# Altium PCB MAX30102_Adapter_PCB.PcbDoc
Units mm, origin at the board's own origin, x right, y up, seen from the top; angles counter-clockwise.
Board outline 7.87 x 10.29 mm, 2 copper layers (Top Layer, Bottom Layer); 6 components, 7 nets, 24 pads, 7 vias.
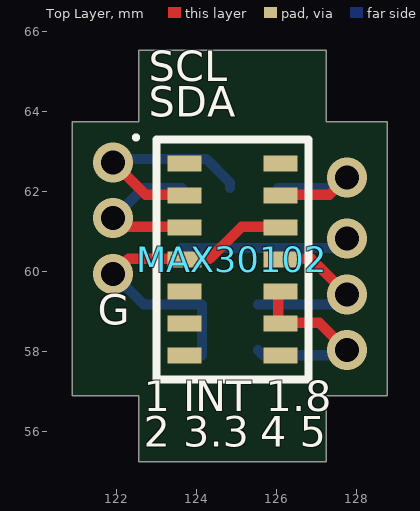
[diagram p0: Top Layer view]
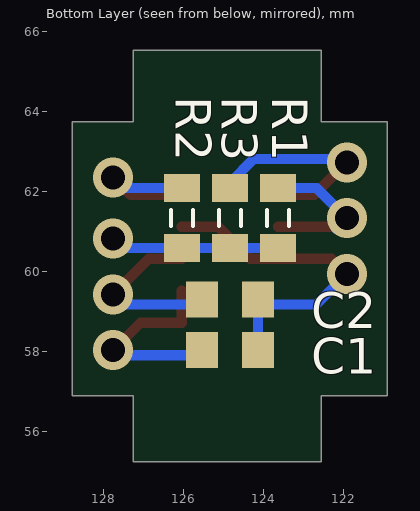
[diagram p1: Bottom Layer view, seen from below]
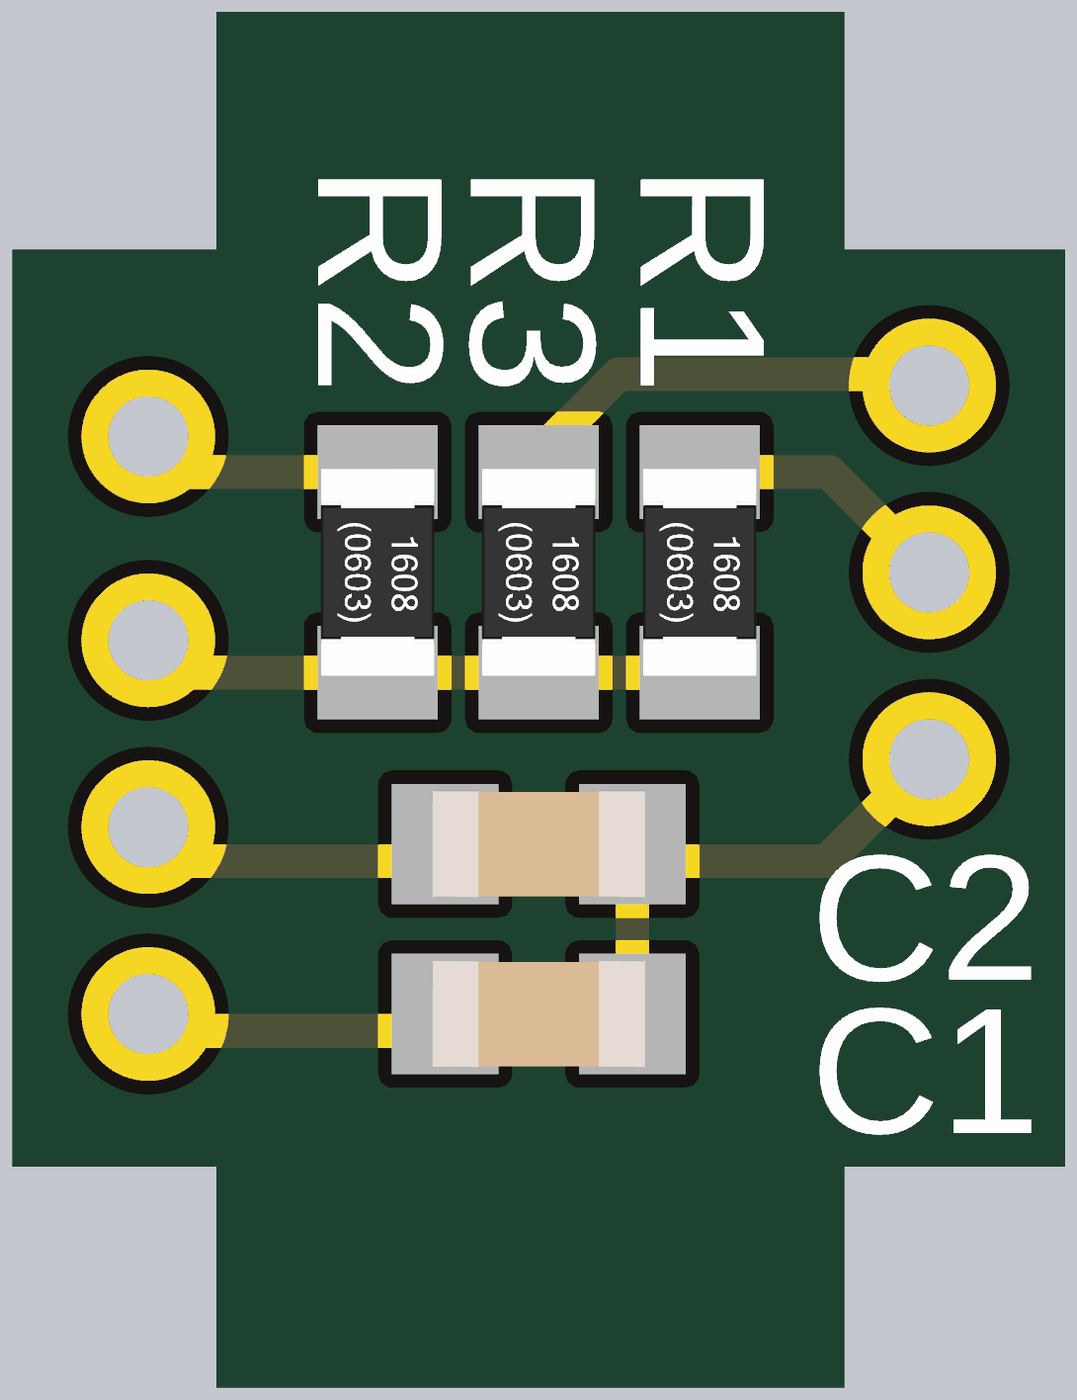
[diagram p2: 3D render of the assembled board from below, using the file's embedded part models]

## Layer stack, top to bottom
Top Solder: solder mask 0.0102, Solder Resist, Dk 3.5
Top Layer: signal copper 0.0356
Dielectric 1: dielectric 0.32, FR-4, Dk 4.8
Bottom Layer: signal copper 0.0356
Bottom Solder: solder mask 0.0102, Solder Resist, Dk 3.5

## Board outline
120.904,56.896 120.904,63.754 122.555,63.754 122.555,65.532 127.254,65.532 127.254,63.754 128.778,63.754 128.778,56.896 127.254,56.896 127.254,55.245 122.555,55.245 122.555,56.896

## Design rules (kind name [scope] priority, off if disabled: settings)
Clearance [All] p1: gap=0.254 ignorepadtopadclearanceinfootprint=FALSE except(0: Arc-Hole Track-Hole SMDPad-Hole THPad-Hole Via-Hole Fill-Hole Poly-Hole Region-Hole Text-Hole)
PolygonConnect [All] p1: connectstyle=Relief reliefconductorwidth=0.254 reliefentries=4 polygonreliefangle="90 Angle" airgapwidth=0.254
RoutingVias [All] p1: holewidth=0.711 width=1.27 viastyle="Through Hole" minholewidth=0.711 minwidth=1.27 maxholewidth=0.711 maxwidth=1.27
SolderMaskExpansion [All] p1: expansion=0.102
Width [All] p1: maxlimit=0.254 minlimit=0.254 preferedwidth=0.254
30 further rules are at their usual default settings.

## Classes and differential pairs
component class MAX30102_Adapter_SCH: C1 C2 R1 R2 R3

## Components (designator, comment, footprint, x,y, rotation, side; value= is the part's Value field where it differs from the comment)
C1 "Cap" "0603 Cap" 124.841,58.039 r180 bottom value=10u
C2 "Cap" "0603 Cap" 124.841,59.309 r0 bottom value=4.7u
MAX30102 "MAX30102" MAX30102 124.903,60.312 r0 top
R1 "Res" "0603 Res" 123.636,61.341 r270 bottom value=1K
R2 "Res" "0603 Res" 126.046,61.341 r270 bottom value=4K7
R3 "Res" "0603 Res" 124.841,61.341 r270 bottom value=1K

## Footprints (in the part's own frame and the unit in brackets; to place one, negate y for a bottom-side part, rotate by r counter-clockwise, add the part's x,y. Pads: shape width x height; smd on the part's side, far side on the other; paste and mask are expansions set on the pad)
"0603 Cap" [mm] "Chip Capacitor, Body 1.6x0.8mm, IPC High Density"
  rect 0.8x0.9 smd: 1(-0.7,0) 2(0.7,0)
  body extent -0.8,-0.4 0.8,0.4, height 0.78
"0603 Res" [mm] "Chip Resistor, Body 1.6x0.8mm, IPC High Density"
  rect 0.7x0.9 smd: 1(-0.75,0) 2(0.75,0)
  silkscreen extent -0.2,-0.28 0.2,0.28, body extent -0.78,-0.43 0.77,0.42, height 0.44
MAX30102 [mm]
  rect 0.85x0.4 smd: 1(-1.205,2.4) 2(-1.205,1.6) 3(-1.205,0.8) 4(-1.205,0) 5(-1.205,-0.8) 6(-1.205,-1.6) 7(-1.205,-2.4) 8(1.205,-2.4) 9(1.205,-1.6) 10(1.205,-0.8) 11(1.205,0) 12(1.205,0.8) 13(1.205,1.6) 14(1.205,2.4)
  silkscreen extent -2.46,-3 1.91,3.1, body extent -1.65,-2.8 1.65,2.8, height 1.47

## Via types
v1: diameter 1, hole 0.6, Top Layer to Bottom Layer, 7 vias

## Nets (pads, with @x,y where several pads share a name; then routed paths per layer and width w, separated by ;. In a path a pad name is that pad's centre, name@x,y a point inside that pad or via, vN(x,y) a via of type N, cw(c..) or ccw(c..) an arc to the next point about the centre after c; other vN are vias at no path point)
1.8V: C2.2 MAX30102.11 | length 4.4
  Top Layer w0.254: MAX30102.11@126.046,60.325 126.873,60.325 v1(127.762,59.436)
  Bottom Layer w0.254: C2.2@125.541,59.182 127.508,59.182 v1(127.762,59.436)
3.3V: R1.2 R2.2 R3.2 | length 4.2
  Bottom Layer w0.254: R1.2 R3.2 R2.2 127.52,60.591 v1(127.762,60.833)
5V: C1.1 MAX30102.9 MAX30102.10 | length 5.1
  Top Layer w0.254: MAX30102.10@126.046,59.525 126.046,58.725 127.076,58.725 v1(127.762,58.039)
  Bottom Layer w0.254: C1.1 125.668,57.912 127.635,57.912 v1(127.762,58.039)
GND: C1.2 C2.1 MAX30102.4 MAX30102.12 | length 8.4
  Top Layer w0.254: v1(121.92,59.944) 122.301,60.325 123.636,60.325 124.333,60.325 125.133,61.125 MAX30102.12@126.046,61.125
  Bottom Layer w0.254: v1(121.92,59.944) 122.682,59.182 124.141,59.182 C1.2 C1.2@124.141,57.912
INT_: MAX30102.13 R2.1 | length 3.7
  Top Layer w0.254: MAX30102.13@126.046,61.925 127.33,61.925 v1(127.762,62.357)
  Bottom Layer w0.254: R2.1 127.496,62.091 v1(127.762,62.357)
SCL: MAX30102.2 R3.1 | length 5.4
  Top Layer w0.254: v1(121.92,62.738) 122.733,61.925 MAX30102.2@123.636,61.925
  Bottom Layer w0.254: v1(121.92,62.738) 122.004,62.822 124.244,62.822 124.841,62.225 R3.1
SDA: MAX30102.3 R1.1 | length 4.2
  Top Layer w0.254: v1(121.92,61.341) 122.136,61.125 MAX30102.3@123.636,61.125
  Bottom Layer w0.254: v1@122.186,61.075 v1(121.92,61.341) 122.67,62.091 R1.1
pads on no net: MAX30102.1 MAX30102.5 MAX30102.6 MAX30102.7 MAX30102.8 MAX30102.14

## Silkscreen, mask and mechanical layers (free items; w line width, h text height)
Top Overlay:
  text "SCL" at 122.809,64.516 h1.3
  text "SDA" at 122.809,63.627 h1.3
  text "G" at 121.539,58.42 h1.3
  text "1 INT" at 122.682,56.261 h1.3
  text "1.8" at 125.73,56.261 h1.3
  text "2 3.3" at 122.682,55.372 h1.3
  text "4 5" at 125.603,55.372 h1.3
Mechanical 1:
  the board outline again, w0.2